# EAGLE board Backplane_Panel_3U18HP (EAGLE 6.6.0)
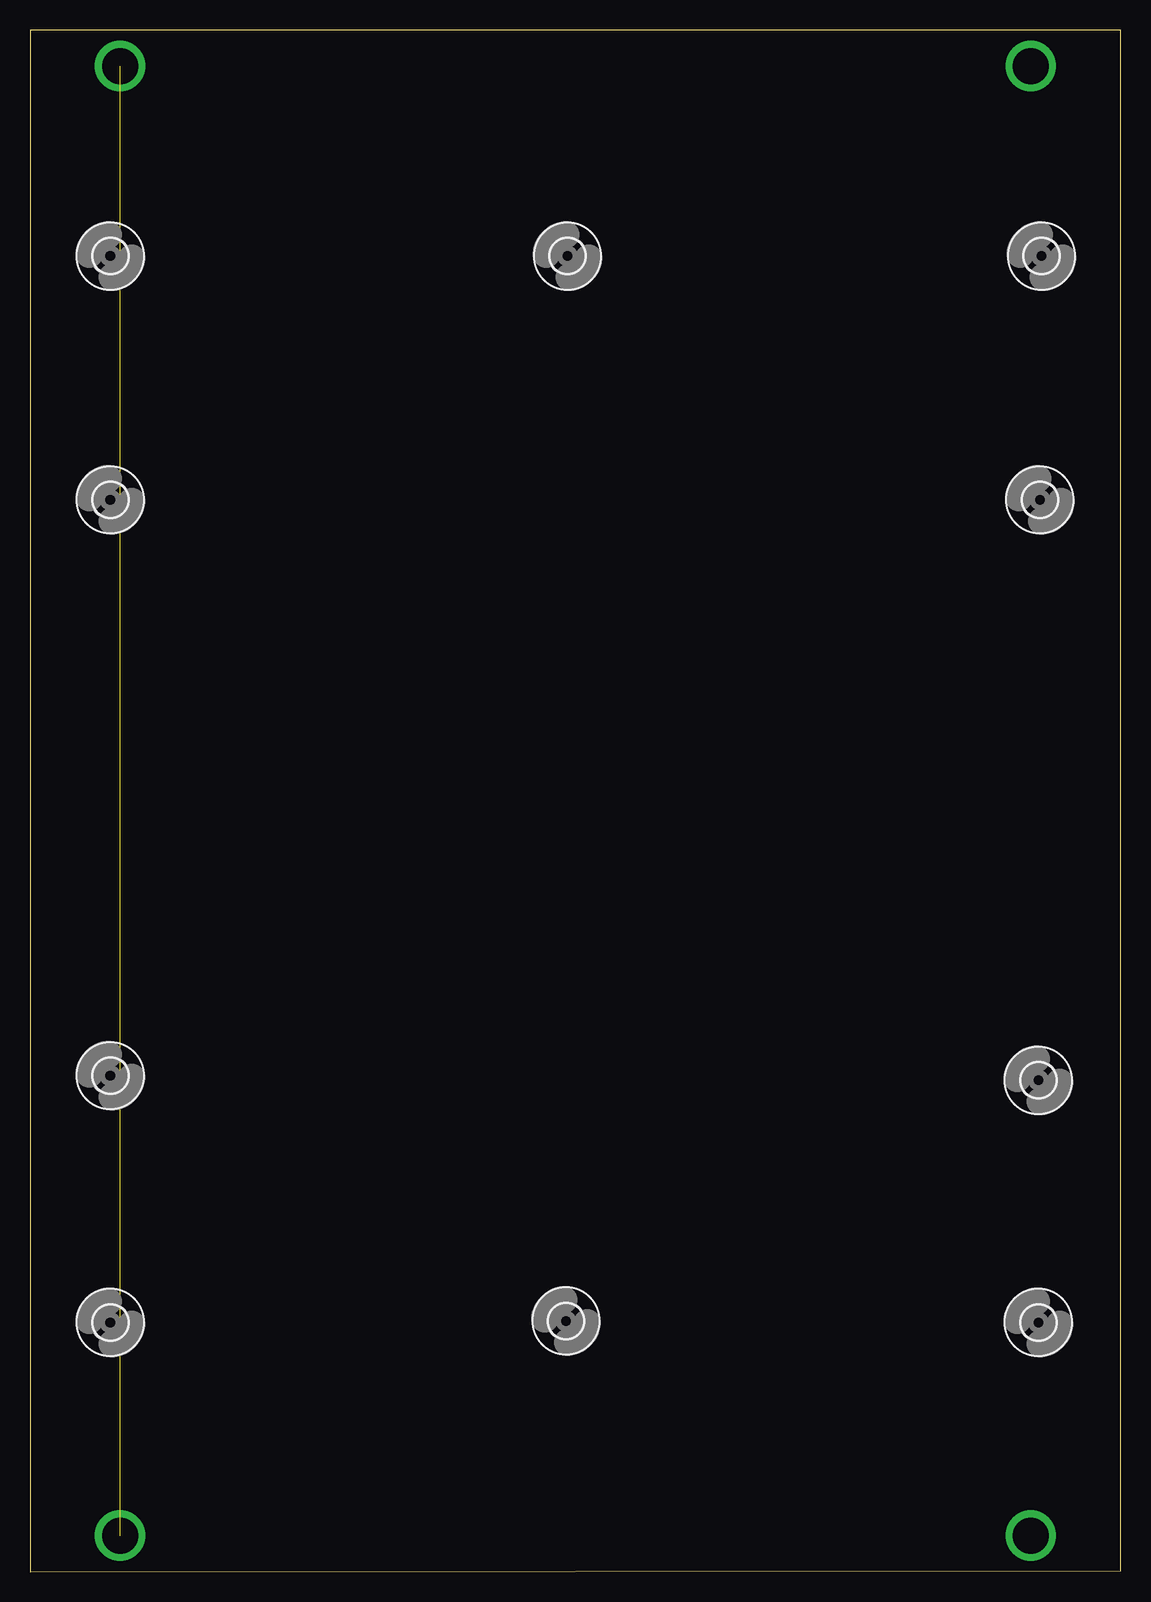
[diagram p0: board, top side]

Size 90.9 x 128.5 mm. Coordinates in mm from the lower left corner, seen from the top.
Outline: 0,0 90.9,0.05 90.9,128.5 0,128.5 0,0
Copper layers (1*16): Top 0.035mm / dielectric 1.5mm / Bottom 0.035mm
Design rules "PatternAgents_7mil": minimum track width 7mil, minimum drill 14mil, track to track 7mil, track to pad 7mil, pad to pad 7mil, via to via 7mil, smd to smd 7mil, copper to edge 7mil, drill to drill 7mil, minimum pad ring 12mil, minimum via ring 10mil, stop-mask expansion 4mil, vias tented up to drill 25mil, thermal gap 7mil

## Footprints (pad centres in the part's own frame; a part is rotated, then mirrored left to right if it is on the bottom)
2,8 = hole 3.2: 0,0

## Placement (x,y rotation side)
H1  MOUNT-HOLE2.8  [2,8]  84.03,20.76 90 top
H2  MOUNT-HOLE2.8  [2,8]  44.66,20.88 90 top
H3  MOUNT-HOLE2.8  [2,8]  84.29,109.66 90 top
H4  MOUNT-HOLE2.8  [2,8]  44.79,109.66 90 top
H5  MOUNT-HOLE2.8  [2,8]  84.03,40.95 90 top
H6  MOUNT-HOLE2.8  [2,8]  6.69,20.76 90 top
H7  MOUNT-HOLE2.8  [2,8]  84.16,89.34 90 top
H8  MOUNT-HOLE2.8  [2,8]  6.69,109.66 90 top
H9  MOUNT-HOLE2.8  [2,8]  6.69,41.33 90 top
H10  MOUNT-HOLE2.8  [2,8]  6.69,89.34 90 top

## Library data of the parts
H1-H10 = euro_rack

## Tracks (layer width: path | path; a pad name or v marks a point on that pad's centre or on a via)
GND  (via drill 3 pad 4.19)  (1 unrouted)
  other vias: 7.5,125.5 7.5,3 83.4,3 83.4,125.5